# EAGLE board circuit (EAGLE 8.5.2)

Size 238.74 x 100 mm. Coordinates in mm from the lower left corner, seen from the top.
Outline: 78.74,0 238.74,0 238.74,100 78.74,100 78.74,0
Copper layers (1*16): Top 0.035mm / dielectric 1.5mm / Bottom 0.035mm
Design rules "default": minimum track width 6mil, minimum drill 0.35mm, track to track 6mil, track to pad 6mil, pad to pad 6mil, via to via 6mil, smd to smd 6mil, copper to edge 40mil, drill to drill 6mil, minimum pad ring 10mil, minimum via ring 8mil, stop-mask expansion 4mil, vias tented up to drill 0mil, thermal gap 10mil

## Footprints (pad centres in the part's own frame; a part is rotated, then mirrored left to right if it is on the bottom)
SPARKFUN_LOGIC_LEVEL_CONVERTER = drill 1.016 pad 1.88: GND1 -5.08,-1.27; GND2 5.08,-1.27; HV 5.08,1.27; HV1 5.08,6.35; HV2 5.08,3.81; HV3 5.08,-3.81; HV4 5.08,-6.35; LV -5.08,1.27; LV1 -5.08,6.35; LV2 -5.08,3.81; LV3 -5.08,-3.81; LV4 -5.08,-6.35
FIDUCIAL_1MM = smd 1 x 1: 1 0,0
POWER_JACK_PTH = drill 2.997 pad 4.318: GND 0,7.7; GNDBREAK 4.7,10.7; PWR 0,13.7
RJ45-8 = drill 1 pad 1.88 square: 1 -4.445,6.35 | drill 1 pad 1.88: 2 -3.175,8.89; 3 -1.905,6.35; 4 -0.635,8.89; 5 0.635,6.35; 6 1.905,8.89; 7 3.175,6.35; 8 4.445,8.89 | hole 3.2: -5.715,0; 5.715,0
1X2-3.5MM = drill 1 pad 2.184: 1 1.8,0; 2 -1.7,0
1X07_ROUND_76 = drill 1 pad 1.93: 1 -7.62,0; 2 -5.08,0; 3 -2.54,0; 4 0,0; 5 2.54,0; 6 5.08,0; 7 7.62,0
1X08-BIG = drill 1.016 pad 1.778 octagon: 1 -8.89,0; 2 -6.35,0; 3 -3.81,0; 4 -1.27,0; 5 1.27,0; 6 3.81,0; 7 6.35,0; 8 8.89,0
LED2X5 = drill 0.813 octagon: A -1.27,0; K 1.27,0
0411/12 = drill 0.914 octagon: 1 -6.35,0; 2 6.35,0
0805-NO = smd 1.3 x 1.5: 1 -0.95,0; 2 0.95,0
PI_HAT_NOSLOTS = drill 0.9 pad 1.676: 1 8.37,51.23; 2 8.37,53.77; 3 10.91,51.23; 4 10.91,53.77; 5 13.45,51.23; 6 13.45,53.77; 7 15.99,51.23; 8 15.99,53.77; 9 18.53,51.23; 10 18.53,53.77; 11 21.07,51.23; 12 21.07,53.77; 13 23.61,51.23; 14 23.61,53.77; 15 26.15,51.23; 16 26.15,53.77; 17 28.69,51.23; 18 28.69,53.77; 19 31.23,51.23; 20 31.23,53.77; 21 33.77,51.23; 22 33.77,53.77; 23 36.31,51.23; 24 36.31,53.77; 25 38.85,51.23; 26 38.85,53.77; 27 41.39,51.23; 28 41.39,53.77; 29 43.93,51.23; 30 43.93,53.77; 31 46.47,51.23; 32 46.47,53.77; 33 49.01,51.23; 34 49.01,53.77; 35 51.55,51.23; 36 51.55,53.77; 37 54.09,51.23; 38 54.09,53.77; 39 56.63,51.23; 40 56.63,53.77 | hole 2.8: 3.5,3.5; 3.5,52.5; 61.5,52.5; 61.5,3.5
SOLDERJUMPER_CLOSEDWIRE = smd 1.168 x 1.6: 1 -0.762,0; 2 0.762,0 | smd 0.635 x 0.203: WIRE 0,0
TO92-EBC-OVAL = drill 0.813 long: B 0,-1.27; C 2.54,-1.27; E -2.54,-1.27
SOIC8_150MIL = smd 0.6 x 2.2: 1 -1.905,-2.6; 2 -0.635,-2.6; 3 0.635,-2.6; 4 1.905,-2.6; 5 1.905,2.6; 6 0.635,2.6; 7 -0.635,2.6; 8 -1.905,2.6
1X03 = drill 1.016: 1 -2.54,0; 2 0,0; 3 2.54,0
TERMBLOCK_1X2-3.5MM = drill 1 pad 2.184: 1 1.8,0; 2 -1.7,0

## Placement (x,y rotation side)
B1  SPARKFUN_LOGIC_LEVEL_CONVERTER  [SPARKFUN_LOGIC_LEVEL_CONVERTER]  -93.98,-129.54 0 top  (outside the outline)
FID3  FIDUCIAL""  [FIDUCIAL_1MM]  45.72,81.28 0 top
FID4  FIDUCIAL""  [FIDUCIAL_1MM]  43.18,81.28 0 top
J1  POWER_JACK  [POWER_JACK_PTH]  -29.21,-48.26 0 top  (outside the outline)
J2  RJ45  [RJ45-8]  -64.77,-134.62 0 top  (outside the outline)
J3  1X2-3.5MM  [1X2-3.5MM]  -95.25,-157.48 0 top  (outside the outline)
JP1  [1X07_ROUND_76]  52.07,76.2 0 top
JP2  [1X08-BIG]  16.51,-53.34 0 top  (outside the outline)
LED1  [LED2X5]  6.35,-36.83 0 top  (outside the outline)
LED2  [LED2X5]  -41.91,-97.79 0 top  (outside the outline)
LED3  [LED2X5]  -41.91,-111.76 0 top  (outside the outline)
R1  [0411/12]  12.7,-22.86 0 top  (outside the outline)
R2  3.9K  [0805-NO]  6.35,76.2 0 top
R3  3.9K  [0805-NO]  0,76.2 0 top
R4  3.9K  [0805-NO]  62.23,81.28 0 top
RPI1  RASPBERRYPI_BPLUS_HATNOSLOTS  [PI_HAT_NOSLOTS]  0,1.27 0 top
SJ1  WP  [SOLDERJUMPER_CLOSEDWIRE]  63.5,77.47 0 top
T1  2N2222  [TO92-EBC-OVAL]  -40.64,-68.58 0 top  (outside the outline)
T2  2N2222  [TO92-EBC-OVAL]  -40.64,-82.55 0 top  (outside the outline)
T3  2N2222  [TO92-EBC-OVAL]  -40.64,-124.46 0 top  (outside the outline)
T4  2N2222  [TO92-EBC-OVAL]  -40.64,-138.43 0 top  (outside the outline)
U2  CAT24C32  [SOIC8_150MIL]  55.88,62.23 0 top
U$1  TSOP38238  [1X03]  8.89,-7.62 0 top  (outside the outline)
X1  [TERMBLOCK_1X2-3.5MM]  62.23,62.23 0 top

## Library data of the parts
B1 = SparkFun-Boards
FID3 FID4 = microbuilder; BOM: EXCLUDE
J1 = SparkFun-Connectors; PROD_ID: CONN-08197
J2 = SparkFun-Connectors; PROD_ID: CONN-08506; SF_ID: PRT-00643
J3 JP2 LED1-LED3 R1 T1-T4 = adafruit
JP1 R2-R4 RPI1 SJ1 U2 X1 = microbuilder
U$1 = radu-eagle-lib

## Nets
3.3V: B1.LV J2.6 J2.8 R2.2 R3.2 R4.2 RPI1.1 RPI1.17 U2.8 U$1.3
5.0V: JP1.1 RPI1.2 RPI1.4
12V: B1.HV J1.PWR J2.1 J2.3 LED2.A LED3.A
BCLK: JP1.6 RPI1.12
BUT1: J2.5 RPI1.7
BUT2: J2.7 RPI1.11
CUE_1: B1.HV1 T1.B
CUE_2: B1.HV2 T2.B
CUE_BOTH: B1.HV3 T3.B T4.B
DIN: JP1.5 RPI1.40
EECLK: R3.1 RPI1.28 U2.6
EEDATA: R2.1 RPI1.27 U2.5
GAIN: JP1.4
GND: B1.GND1 B1.GND2 J3.2 JP1.2 LED1.K RPI1.6 RPI1.9 RPI1.14 RPI1.20 RPI1.25 RPI1.30 RPI1.34 RPI1.39 SJ1.1 T1.E T2.E T3.E T4.E U2.1 U2.2 U2.3 U2.4 U$1.1
GPIO13: RPI1.33
GPIO20: RPI1.38
GPIO22: RPI1.15
GPIO24: RPI1.18
GPIO26: RPI1.37
GPIO27: RPI1.13
LED1: J2.2 LED3.K T2.C T3.C
LED1_CTRL: B1.LV1 RPI1.36
LED2: J2.4 LED2.K T1.C T4.C
LED2_CTRL: B1.LV2 RPI1.31
LED_BOTH_CTRL: B1.LV3 RPI1.32
LIRC_IN: RPI1.16 U$1.2
LRCLK: JP1.7 RPI1.35
N$2: LED1.A R1.2
N$3: J1.GND J1.GNDBREAK
N$16: R4.1 SJ1.2 U2.7
PWR_LED: R1.1 RPI1.29
REWARD: J3.1 RPI1.22
RXD: RPI1.10
SCL: RPI1.5
SD_MODE: JP1.3
SDA: RPI1.3
SPI_CE0: RPI1.24
SPI_CE1: RPI1.26
SPI_MISO: RPI1.21
SPI_MOSI: RPI1.19
SPI_SCLK: RPI1.23
TXD: RPI1.8
VO+: X1.2
VO-: X1.1

## Tracks (layer width: path | path; a pad name or v marks a point on that pad's centre or on a via)
3.3V  (9 unrouted)
5.0V  (2 unrouted)
12V  (5 unrouted)
BCLK  (1 unrouted)
BUT1  (1 unrouted)
BUT2  (1 unrouted)
CUE_1  (1 unrouted)
CUE_2  (1 unrouted)
CUE_BOTH  (2 unrouted)
DIN  (1 unrouted)
EECLK  (2 unrouted)
EEDATA  (2 unrouted)
GND  (22 unrouted)
LED1  (3 unrouted)
LED1_CTRL  (1 unrouted)
LED2  (3 unrouted)
LED2_CTRL  (1 unrouted)
LED_BOTH_CTRL  (1 unrouted)
LIRC_IN  (1 unrouted)
LRCLK  (1 unrouted)
N$2  (1 unrouted)
N$3  (1 unrouted)
N$16  (2 unrouted)
PWR_LED  (1 unrouted)
REWARD  (1 unrouted)